# Altium PCB PowerSupply_aux.PcbDoc
Units mm, origin at the board's own origin, x right, y up, seen from the top; angles counter-clockwise.
Board outline 73.7 x 168 mm, 4 copper layers (Top Layer, VCC, GND, Bottom Layer), stack 0.905 mm thick; 32 components, 12 nets, 83 pads, 70 vias.
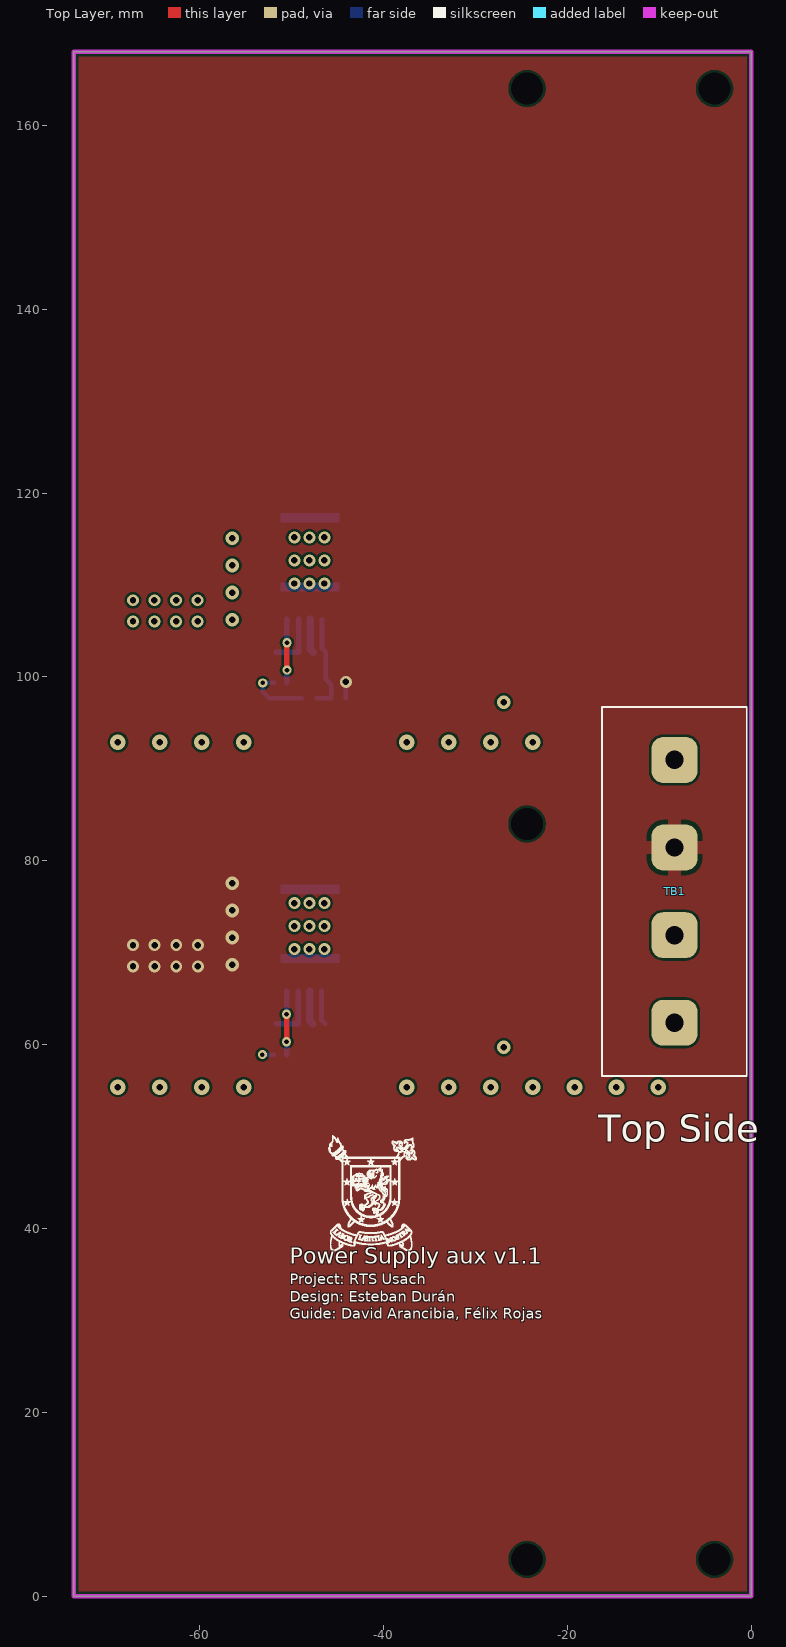
[diagram p0: Top Layer view]
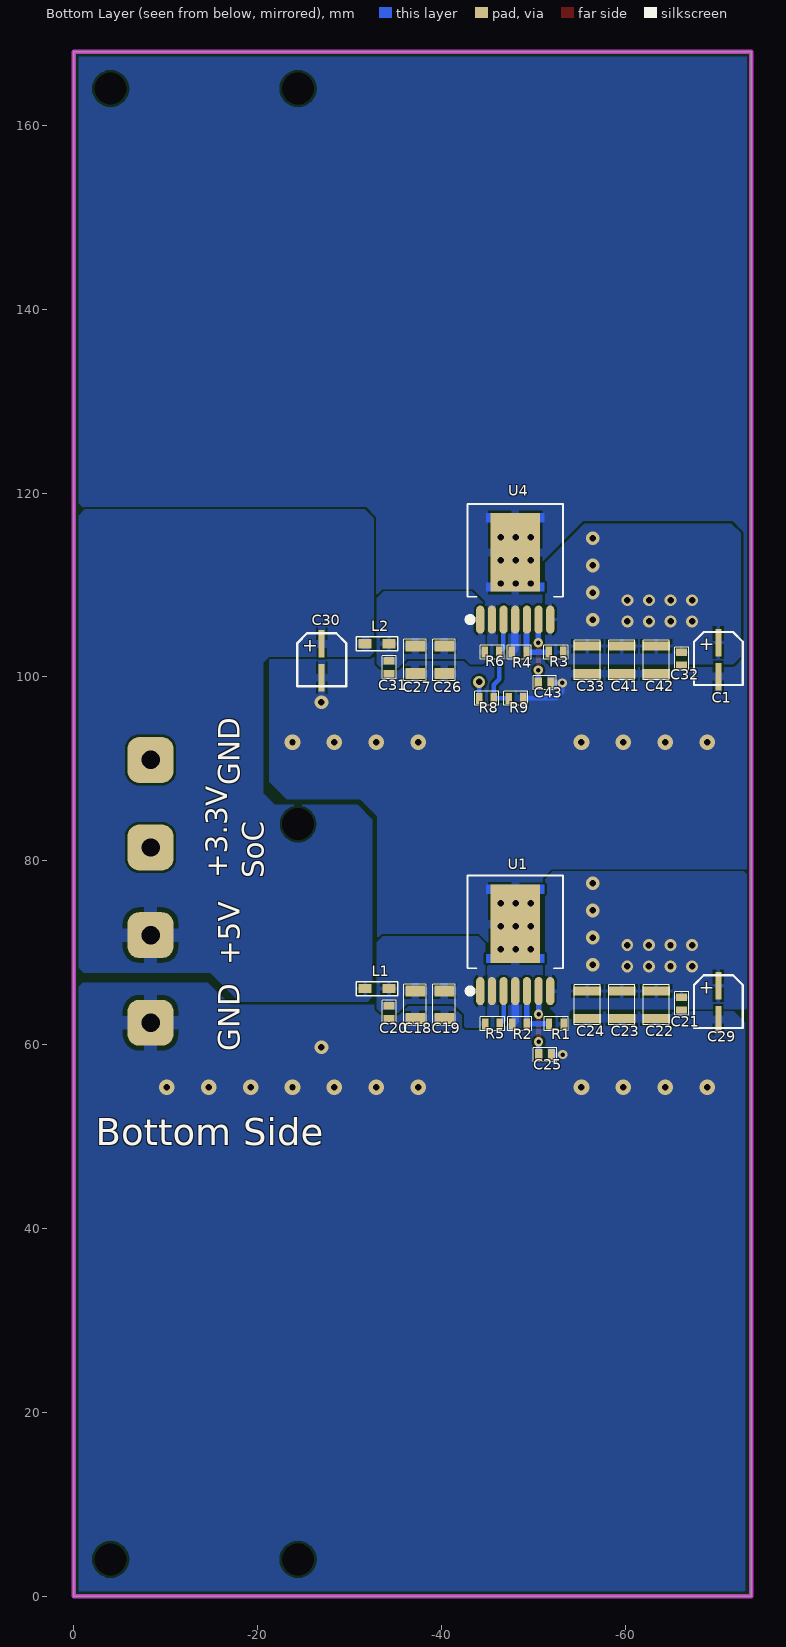
[diagram p1: Bottom Layer view, seen from below]
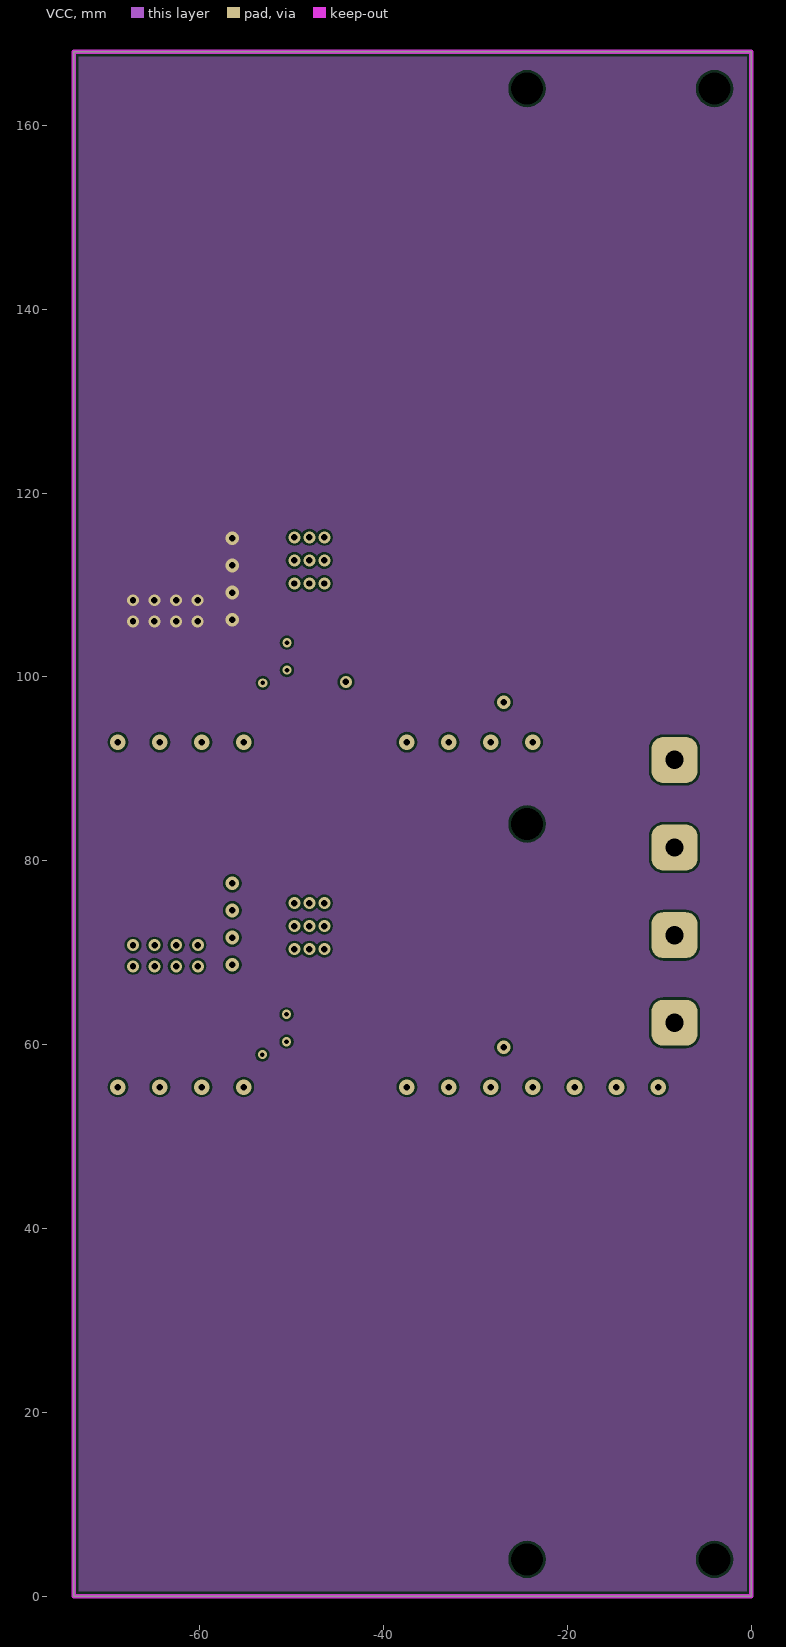
[diagram p2: VCC]
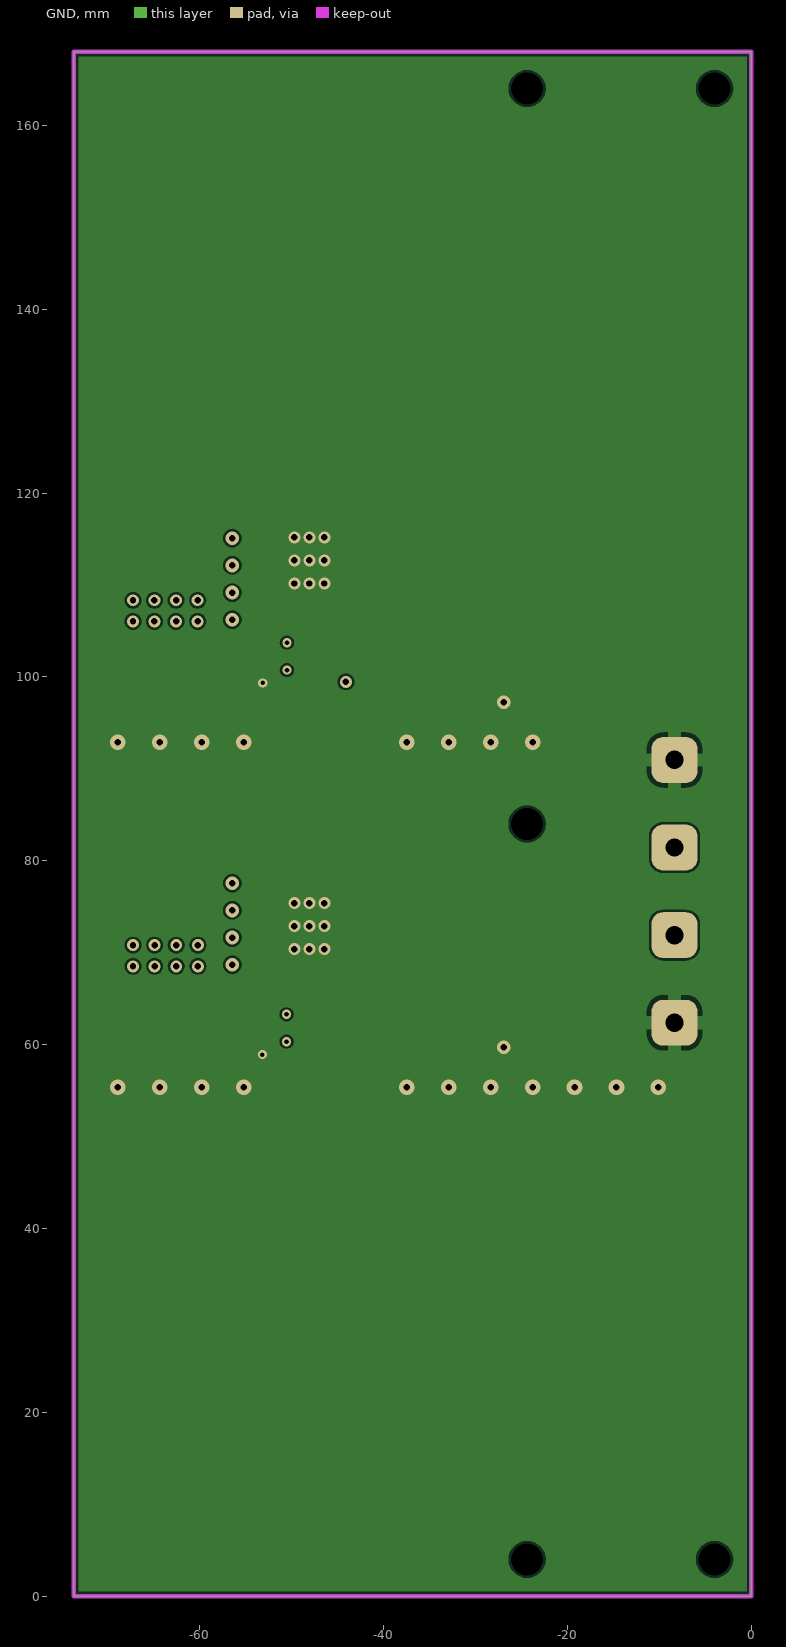
[diagram p3: GND]
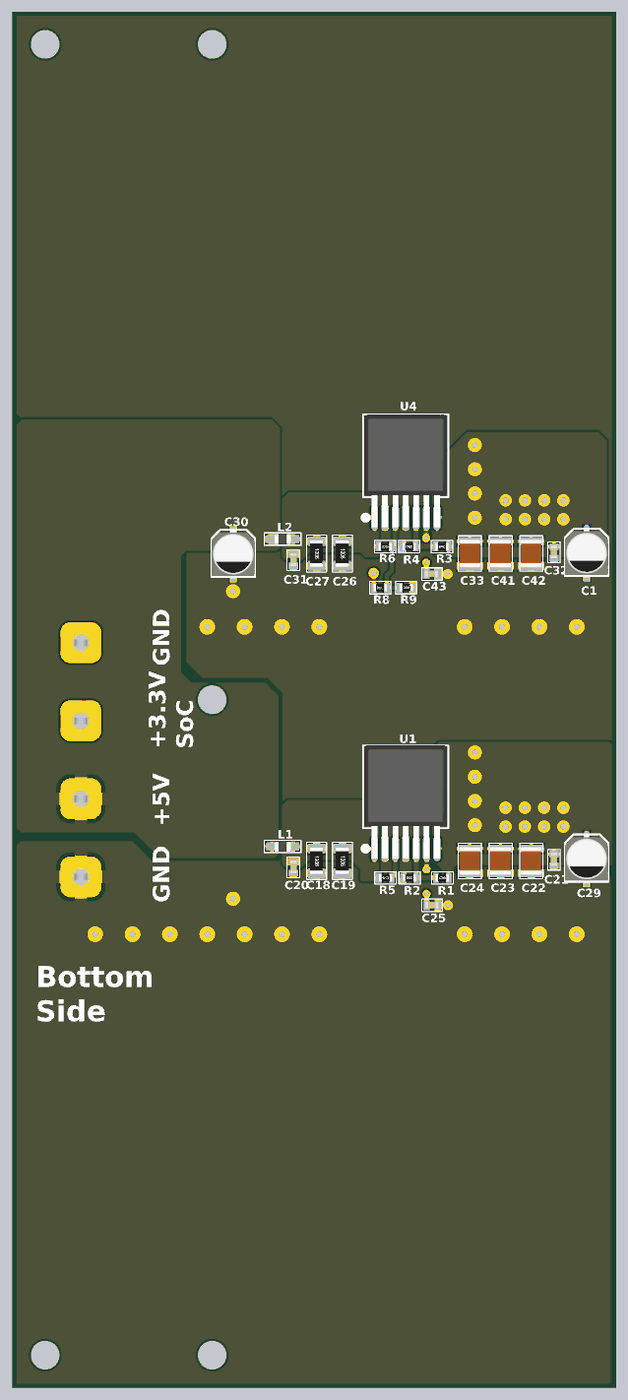
[diagram p4: 3D render of the assembled board from below, using the file's embedded part models]

## Layer stack, top to bottom
Top Solder: solder mask 0.0102, Solder Resist, Dk 3.5
Top Layer: signal copper 0.0356
Dielectric 4: dielectric 0.254, Dk 4.2
VCC: signal copper 0.036
Dielectric 2: dielectric 0.254, Dk 4.2
GND: signal copper 0.036
Dielectric 3: dielectric 0.254, Dk 4.2
Bottom Layer: signal copper 0.0356
Bottom Solder: solder mask 0.0102, Solder Resist, Dk 3.5

## Board outline
-73.697,0 0,0 0,168 -73.697,168

## Design rules (kind name [scope] priority, off if disabled: settings)
Clearance [All] p1: gap=0.254 except(0.125: Track-Via; 0.127: Track-Track Track-SMDPad; 0.16: Track-Region; 0.17: SMDPad-Region THPad-Region Via-Region Region-Region; 0.2: SMDPad-SMDPad SMDPad-Via Via-Via)
ComponentClearance [All] p1: gap=0 collisioncheckmode=3 verticalgap=0 showdistances=FALSE
DiffPairsRouting [All] p1: maxlimit=1 minlimit=0.2 mostfreqgap=0.2 toplayer_minwidth=0.2 toplayer_maxwidth=0.5 toplayer_prefwidth=0.4 midlayer1_minwidth=0.2 midlayer1_maxwidth=0.5 midlayer1_prefwidth=0.4 midlayer2_minwidth=0.2 midlayer2_maxwidth=0.5 midlayer2_prefwidth=0.4 bottomlayer_minwidth=0.2 bottomlayer_maxwidth=0.5 bottomlayer_prefwidth=0.4 maxuncoupledlength=12.7
Height [All] p1: minheight=0 maxheight=50 prefheight=12.7
HoleSize [All] p1: absolutevalues=TRUE maxlimit=5 minlimit=0.025 maxpercent=80.000 minpercent=20.000
PolygonConnect Vias [All vs isvia] p1: connectstyle=Direct reliefconductorwidth=0.254 reliefentries=4 polygonreliefangle="90 Angle" airgapwidth=0.254
PolygonConnect "Regleta grande" [All vs HasFootprint('Terminal Block 4 pos 15A')] p2: connectstyle=Relief reliefconductorwidth=1.5 reliefentries=4 polygonreliefangle="90 Angle" airgapwidth=0.5
PolygonConnect Misil [IsNamedPolygon('Plano +3.3V_TopLayer') OR IsNamedPolygon('Plano_entrada_+5V')] p3: connectstyle=Relief reliefconductorwidth=0.4 reliefentries=4 polygonreliefangle="90 Angle" airgapwidth=0.254
PolygonConnect "Planos conectores tarjetas hijas" [IsNamedPolygon('GND_TarjetaHija') OR IsNamedPolygon('+5V_TarjetaHija') OR IsNamedPolygon('+3.3V_TarjetaHija')] p4: connectstyle=Relief reliefconductorwidth=0.3 reliefentries=4 polygonreliefangle="90 Angle" airgapwidth=0.254
PolygonConnect Planos+3.3V_TI [IsNamedPolygon('Plano_entrada2_GND') OR IsNamedPolygon('Plano_entrada2_+5V') OR HasFootprint('CAP_0603') OR HasFootprint('RES_1206') or HasFootprint('CAP_0805') OR IsNamedPolygon('+5V_In referencia') OR IsNamedPolygon('GND_referencia') OR IsNamedPolygon('+2.5V Plano_TOP')] p5: connectstyle=Relief reliefconductorwidth=0.9 reliefentries=4 polygonreliefangle="90 Angle" airgapwidth=0.254
PolygonConnect Directo [IsNamedPolygon('Plano_entrada_+5V') OR IsNamedPolygon('Plano_entrada_GND') OR IsNamedPolygon('GND_Soc_Top') OR IsNamedPolygon('Plano VIN33_Auxiliar') OR IsNamedPolygon('Plano +3.3V_TopLayer')  OR IsNamedPolygon('Plano_entrada2_GND')] p6: connectstyle=Direct reliefconductorwidth=0.254 reliefentries=4 polygonreliefangle="90 Angle" airgapwidth=0.254
PolygonConnect [All] p7: connectstyle=Relief reliefconductorwidth=0.5 reliefentries=4 polygonreliefangle="90 Angle" airgapwidth=0.254
RoomDefinition "Power supply" [InComponentClass('Power supply')] p1: confinementstyle=ConfineIn formatcopy=TRUE lockcomponents=FALSE outline -611.7,0 -475.7,0 -475.7,168 -611.7,168
RoutingVias [All] p1: holewidth=0.711 width=1.27 viastyle="Through Hole" minholewidth=0.711 minwidth=1.27 maxholewidth=0.711 maxwidth=1.27
SolderMaskExpansion [All] p1: expansion=0.102
Width [All] p1: maxlimit=2 minlimit=0.12 preferedwidth=0.7
26 further rules are at their usual default settings.

## Components (designator, comment, footprint, x,y, rotation, side; value= is the part's Value field where it differs from the comment)
C1 "22uF" "CAP Electrolítico Radial SMD2" -70.107,103.74 r180 bottom
C18 "22uF" RES_1206 -37.13,65.83 r0 bottom
C19 "22uF" RES_1206 -40.29,65.83 r0 bottom
C20 "33nF" CAP_0603 -34.29,64.24 r180 bottom
C21 "220nF" CAP_0603 -66.11,65.17 r180 bottom
C22 "100uF" Cap_1210 -63.35,65.83 r0 bottom
C23 "100uF" Cap_1210 -59.6,65.83 r0 bottom
C24 "100uF" Cap_1210 -55.85,65.83 r0 bottom
C25 "220nF" CAP_0603 -50.56,58.915 r90 bottom
C26 "22uF" RES_1206 -40.29,103.348 r0 bottom
C27 "22uF" RES_1206 -37.13,103.348 r0 bottom
C29 "22uF" "CAP Electrolítico Radial SMD2" -70.107,66.41 r180 bottom
C30 "22uF" "CAP ELECTROLíTICO RADIAL SMD2" -26.967,103.608 r180 bottom
C31 "33nF" CAP_0603 -34.29,101.758 r180 bottom
C32 "220nF" CAP_0603 -66.11,102.694 r180 bottom
C33 "100uF" Cap_1210 -55.85,103.348 r0 bottom
C41 "100uF" Cap_1210 -59.6,103.348 r0 bottom
C42 "100uF" Cap_1210 -63.35,103.348 r0 bottom
C43 "220nF" CAP_0603 -50.513,99.344 r90 bottom
L1 "600Ω" "WE-CBF_0805_High Current" -32.99,66.09 r180 bottom
L2 "600Ω" "WE-CBF_0805_High Current" -32.99,103.608 r180 bottom
R1 "4.7k" RES_0603 -51.69,62.265 r90 bottom
R2 "1.5k" RES_0603 -47.69,62.265 r90 bottom
R3 "4.7k" RES_0603 -51.653,102.694 r90 bottom
R4 "1.5k" RES_0603 -47.643,102.694 r90 bottom
R5 "DNP" RES_0603 -46.347,62.265 r270 bottom
R6 "DNP" RES_0603 -46.3,102.694 r270 bottom
R8 "10k" RES_0603 -44.1,97.677 r90 bottom
R9 "10k" RES_0603 -48.89,97.677 r270 bottom
TB1 "Terminal Block 4 pos 15A" "Terminal Block 4 pos 15A" -16.234,56.593 r90 top
U1 "171050601" 7TO-PMOD -48.02,71.53 r90 bottom
U4 "171050601" 7TO-PMOD -48.02,111.934 r90 bottom

## Footprints (in the part's own frame and the unit in brackets; to place one, negate y for a bottom-side part, rotate by r counter-clockwise, add the part's x,y. Pads: shape width x height; smd on the part's side, far side on the other; paste and mask are expansions set on the pad)
7TO-PMOD [mm]
  oval 3.06x0.89 smd: 1(-5.7,3.81) 2(-5.7,2.54) 3(-5.7,1.27) 4(-5.7,0) 5(-5.7,-1.27) 6(-5.7,-2.54) 7(-5.7,-3.81)
  rect 8.54x5.35 smd: 8(1.605,0)
  Top Layer region: 4.875,-3.2 4.875,3.2 5.875,3.2 5.875,-3.2
  Top Layer region: -1.665,3.2 -1.665,-3.2 -2.665,-3.2 -2.665,3.2
  silkscreen extent -6,-5.21 6.89,5.21, body extent -6.89,-5.08 6.88,5.08, height 4.8
"CAP Electrolítico Radial SMD2" [mm] "Mediano"
  rect 0.65x3 smd: 1(0,0) 2(0,-3.7)
  silkscreen extent -2.65,-4.61 2.65,1.14, body extent -2.66,-4.79 2.64,1.11, height 5.41
"CAP ELECTROLíTICO RADIAL SMD2" [mm] "Mediano"
  rect 0.65x3 smd: 1(0,0) 2(0,-3.7)
  silkscreen extent -2.65,-4.61 2.65,1.14, body extent -2.66,-4.79 2.64,1.11, height 5.41
CAP_0603 [mm] "CAP CER 0603"
  rect 1.2x0.8 smd: 1(0,0) 2(0,-1.4)
  silkscreen extent -0.76,-1.96 0.76,0.56, body extent -0.39,-1.45 0.41,0.15, height 0.4
Cap_1210 [mm] "1210 SMD"
  rect 3x1 smd: 1(0,0) 2(0,3)
  silkscreen extent -1.42,-0.66 1.41,3.66, body extent -1.3,-0.2 1.3,3.2, height 1.5
RES_0603 [mm] "RES 0603"
  rect 1.2x0.7 smd: 1(0,0) 2(0,-1.6)
  silkscreen extent -0.76,-2.11 0.76,0.51, body extent -0.45,-1.59 0.45,0.01, height 0.5
RES_1206 [mm] "RES 1206"
  rect 2.1x1.2 smd: 1(0,0) 2(0,3)
  silkscreen extent -1.22,-0.76 1.22,3.76, body extent -0.78,-0.1 0.82,3.1, height 0.6
"Terminal Block 4 pos 15A" [mm] "Molex"
  rrect50% 5x5 hole 2: 1(5.786,-7.884) 2(15.316,-7.884) 3(24.846,-7.884) 4(34.376,-7.884)
  silkscreen extent 0,-15.75 40.13,0, body extent 0,-15.75 40.13,0, height 16.76
"WE-CBF_0805_High Current" [mm] "SMD EMI Suppression Ferrite  Bead, body 2.0mmx1.2mm"
  rect 1.4x1 smd: 1(-1.3,0) 2(1.3,0)
  silkscreen extent -2.25,-0.75 2.25,0.75, body extent -1,-0.6 1,0.6, height 0.93

## Part data
C1 C29 C30: library part "Cap Pol", "Polarized Capacitor (Radial)"
C18 C19 C26 C27: library part Cap_1206, "Capacitor"
C20 C21 C25 C31 C32 C43: library part Cap_0603, "Capacitor"
C22 C23 C24 C33 C41 C42: library part Cap_1210, "Capacitor"
L1 L2: library part "WE-CBF, 742792040", "WE-CBF SMD EMI Suppression Ferrite Bead, 0805, 600O"
R1 R2 R3 R4 R5 R6 R8 R9: library part Res0603
TB1: "Molex Through Hole"
U1 U4: library part WE-DCDC-171050601, "DC/DC VIN = 6V-36V, 5A, VOUT = 0.8V-6V"

## Free pads (board coordinates)
  round 1 hole 3.5: ""(-24.39,4) ""(-24.39,84) ""(-24.39,164) ""(-4,4) ""(-4,164)

## Via types
v1: diameter 1.3, hole 0.7, Top Layer to Bottom Layer, 35 vias
v2: diameter 1.7, hole 0.7, Top Layer to Bottom Layer, 19 vias
v3: diameter 1.5, hole 0.7, Top Layer to Bottom Layer, 10 vias
v4: diameter 1, hole 0.5, Top Layer to Bottom Layer, 6 vias

## Nets (pads, with @x,y where several pads share a name; then routed paths per layer and width w, separated by ;. In a path a pad name is that pad's centre, name@x,y a point inside that pad or via, vN(x,y) a via of type N, cw(c..) or ccw(c..) an arc to the next point about the centre after c; other vN are vias at no path point)
+3.3V: C1.1 C32.1 C33.1 C41.1 C42.1 R3.2 U4.7
  other v1: -67.262,106.038 -64.93,106.038 -62.578,106.038 -60.225,106.038 -67.262,108.338 -64.93,108.338 -62.578,108.338 -60.225,108.338
  other v3: -56.457,106.218 -56.457,109.175 -56.457,112.131 -56.457,115.088
+5V: C30.1 L1.1 L2.1 TB1.2
GND: C1.2 C18.2 C19.2 C20.2 C21.2 C22.2 C23.2 C24.2 C25.2 C26.2 C27.2 C29.2 C30.2 C31.2 C32.2 C33.2 C41.2 C42.2 C43.2 R2.1 R4.1 R9.1 TB1.1 TB1.4 U1.2 U1.4 U1.8 U4.2 U4.4 U4.8 | length 15.4
  Bottom Layer w0.5: v4(-53.185,58.915) C25.2 ; C43.2 v4(-53.138,99.344) -53.138,98.355 -52.46,97.677 R9.1
  Bottom Layer w0.8: U1.4 -48.02,62.595 R2.1 ; U4.4@-47.973,106.259 -47.973,103.024 R4.1
  other v1: -49.707,70.378 -48.077,70.378 -46.447,70.378 -49.707,72.888 -48.077,72.888 -46.447,72.888 -49.707,75.398 -48.077,75.398 -46.447,75.398 -49.707,110.164 -48.077,110.164 -46.447,110.164 -49.707,112.674 -48.077,112.674 -46.447,112.674 -49.707,115.184 -48.077,115.184 -46.447,115.184
  other v2: -68.9,55.38 -64.34,55.38 -59.78,55.38 -55.22,55.38 -37.467,55.38 -32.907,55.38 -28.347,55.38 -23.787,55.38 -19.227,55.38 -14.667,55.38 -10.107,55.38 -68.9,92.898 -64.34,92.898 -59.78,92.898 -55.22,92.898 -37.467,92.898 -32.907,92.898 -28.347,92.898 -23.787,92.898
  other v3: -26.937,59.709 -26.937,97.238
NetC18_1: C18.1 C19.1 C20.1 L1.2 R5.2 U1.1
NetC25_1: C25.1 U1.6 | length 6.9
  Top Layer w0.6: v4(-50.56,60.315) v4(-50.56,63.295)
  Bottom Layer w0.6: C25.1 v4(-50.56,60.315) ; v4(-50.56,63.295) U1.6
NetC26_1: C26.1 C27.1 C31.1 L2.2 R6.2 U4.1
NetC43_1: C43.1 U4.6 | length 6.9
  Top Layer w0.6: v4(-50.513,100.744) v4(-50.513,103.724)
  Bottom Layer w0.6: C43.1 v4(-50.513,100.744) ; v4(-50.513,103.724) U4.6@-50.513,106.259
NetR1_1: R1.1 R2.2 U1.5 | length 6
  Bottom Layer w0.6: R1.1 R2.2 U1.5
NetR3_1: R3.1 R4.2 U4.5 | length 8.4
  Bottom Layer w0.6: R3.1 R4.2@-49.253,102.694 ; R3.1@-51.643,102.694 R4.2 U4.5@-49.243,106.259
NetR5_1: R5.1 U1.3 | length 3.7
  Bottom Layer w0.5: U1.3 -46.75,62.668 R5.1
NetR6_1: R6.1 R8.2 R9.2 U4.3 | length 10.6
  Bottom Layer w0.5: R9.2 R8.2 -45.7,99.147 -46.3,99.747 R6.1 -46.703,103.097 U4.3@-46.703,106.259
VIN33: C21.1 C22.1 C23.1 C24.1 C29.1 R1.2 R8.1 TB1.3 U1.7 | length 1.8
  Bottom Layer w0.5: R8.1 v1(-44.1,99.467)
  other v1: -67.262,68.52 -64.91,68.52 -62.558,68.52 -60.205,68.52 -67.262,70.82 -64.91,70.82 -62.558,70.82 -60.205,70.82
  other v3: -56.457,68.689 -56.457,71.646 -56.457,74.602 -56.457,77.559

## Polygon pours and split planes (outlines as drawn)
+3.3V on VCC "+3.3V" (solid, pour order 134): 0,168 -73.697,168 -73.697,0 0,0
GND on GND "GND" (solid, pour order 138): 0,168 -73.697,168 -73.697,0 0,0
NetC18_1 on Bottom Layer "+5V_filtrados" (solid, pour order 24): -33.582,71.78 -43.978,71.78 -44.74,71.018 -44.74,61.91 -44.67,61.84 -43.9,61.84 -42.62,61.84 -42.445,62.015 -42.445,63.295 -41.28,64.46 -36.27,64.46 -35.24,63.43 -33.42,63.43 -32.93,63.92 -32.93,71.128
NetC26_1 on Bottom Layer "+5V_filtrados" (solid, pour order 20): -33.688,109.298 -43.31,109.298 -44.74,107.868 -44.74,101.588 -44.53,101.378 -43.12,101.378 -42.52,101.978 -36.27,101.978 -35.24,100.948 -33.42,100.948 -32.93,101.438 -32.93,108.54
GND on Bottom Layer "Plano_entrada2_GND" (solid, pour order 132): -73.697,70.72 -64.145,62.28 -33,62.28 -33,84.828 -31.16,86.668 -23.179,86.668 -21.25,88.597 -21.25,118.22 -1.21,118.22 0,119.43 0,168 -73.697,168 -73.697,122.12
+3.3V on Bottom Layer "Plano +3.3V_TopLayer" (solid, pour order 130): -71.756,101.389 -51.88,101.389 -51.26,102.009 -51.26,112.42 -55.52,116.68 -71.54,116.68 -72.557,115.663 -72.557,102.19
GND on Bottom Layer "Plano_entrada2_GND" (solid, pour order 128): -73.04,0 0.002,0 0,65.76 -0.985,66.745 -14.595,66.745 -17.01,64.33 -71.08,64.33 -73.04,62.37
VIN33 on Bottom Layer "Plano +3.3V_TopLayer" (solid, pour order 122): -73.092,63.865 -54.22,63.865 -53.878,63.522 -53.878,61.68 -53.579,61.381 -52.83,61.381 -52.438,61.773 -52.438,63.307 -51.26,64.485 -51.26,77.99 -52.11,78.84 -72.87,78.84 -73.698,78.012 -73.698,64.471
+5V on Bottom Layer "Plano_entrada2_+5V" (solid, pour order 126): 0,102.188 -32.217,102.188 -32.647,102.618 -32.647,105.415 -32.647,117.263 -31.662,118.248 -1.21,118.248 0,117.038
+5V on Bottom Layer "Plano_entrada_+5V" (solid, pour order 28): -21.857,86.08 -30.877,86.08 -32.48,84.477 -32.48,65.19 -31.948,64.658 -17.997,64.658 -14.857,67.798 -1.059,67.798 -0.001,68.857 -0.001,84.574 -0.001,102.95 -21.981,102.95 -20.599,101.568 -20.599,87.338
VIN33 on Top Layer "VIN33_SOC" (solid, pour order 140): 0,168 -73.697,168 -73.697,0 0,0

## Keep-outs
Keep-Out Layer:
  the board outline again, w0.5

## Silkscreen, mask and mechanical layers (free items; w line width, h text height)
Top Overlay:
  drawing of 9141 lines, arcs and shapes, not listed
  text "Top Side" at -16.65,48.43 h5
  text "Power Supply aux v1.1" at -50.193,35.542 h3
  text "Project: RTS Usach" at -50.193,33.533 h2
  text "Design: Esteban Durán" at -50.193,31.667 h2
  text "Guide: David Arancibia, Félix Rojas" at -50.193,29.802 h2
Bottom Overlay:
  text "GND" at -18.834,88.19 h4 r270
  text "+3.3V / SoC" at -21.43,78.08 h4 r270
  text "+5V" at -18.811,68.62 h4 r270
  text "GND" at -18.834,59.29 h4 r270
  text "Bottom Side" at -2.38,48.08 h5

## Dimensions
0,168 to 0,0 on Mechanical 1
-73.697,168 to 0,168 on Mechanical 1

## Text inside footprints (layer, text, board x,y; h text height)
C1: Bottom Overlay "+" at -67.987,102.89 h1.52
C29: Bottom Overlay "+" at -67.987,65.56 h1.52
C30: Bottom Overlay "+" at -24.847,102.758 h1.52